# EAGLE board LibreServo-v2.2 (EAGLE 7.6.0)
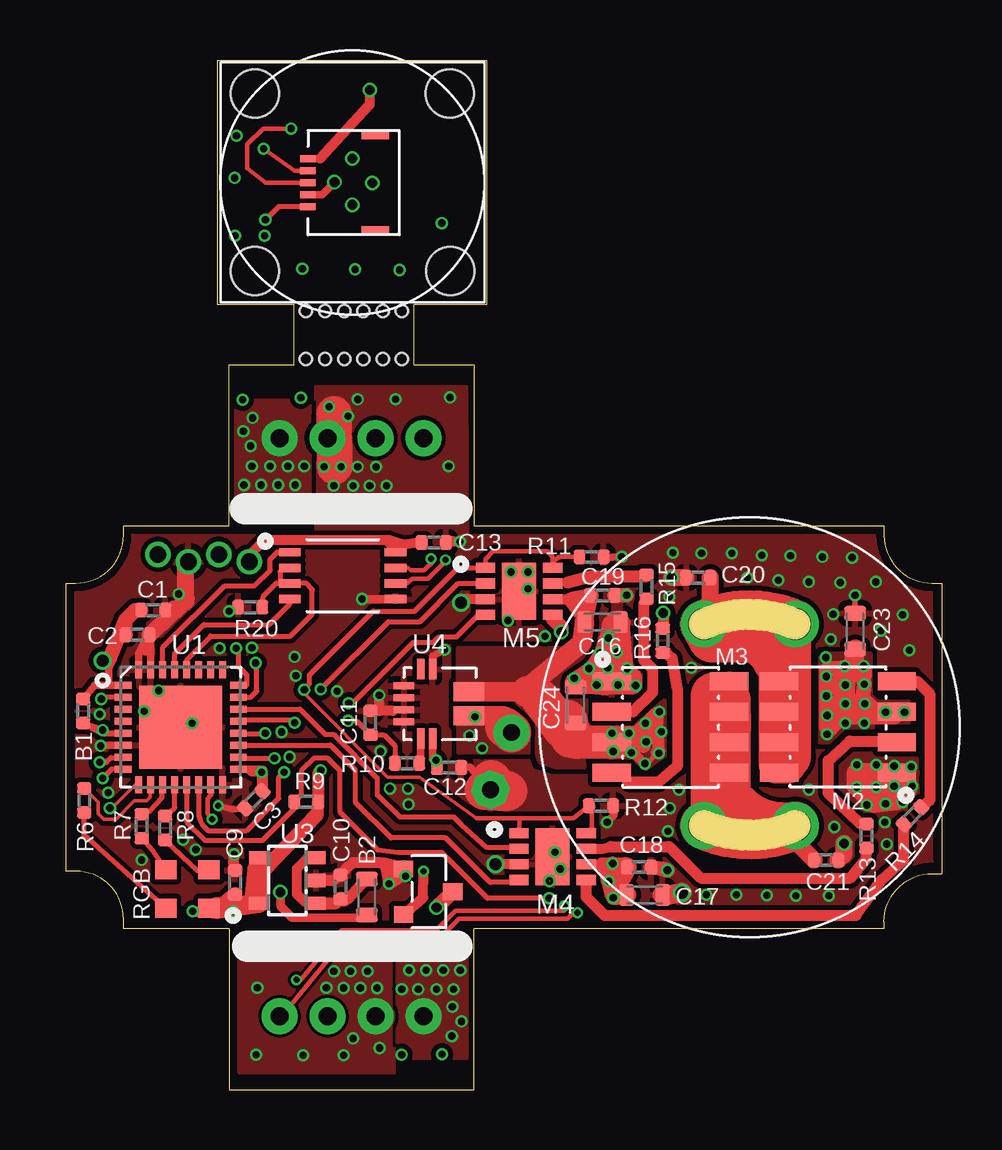
[diagram p0: board, top side]
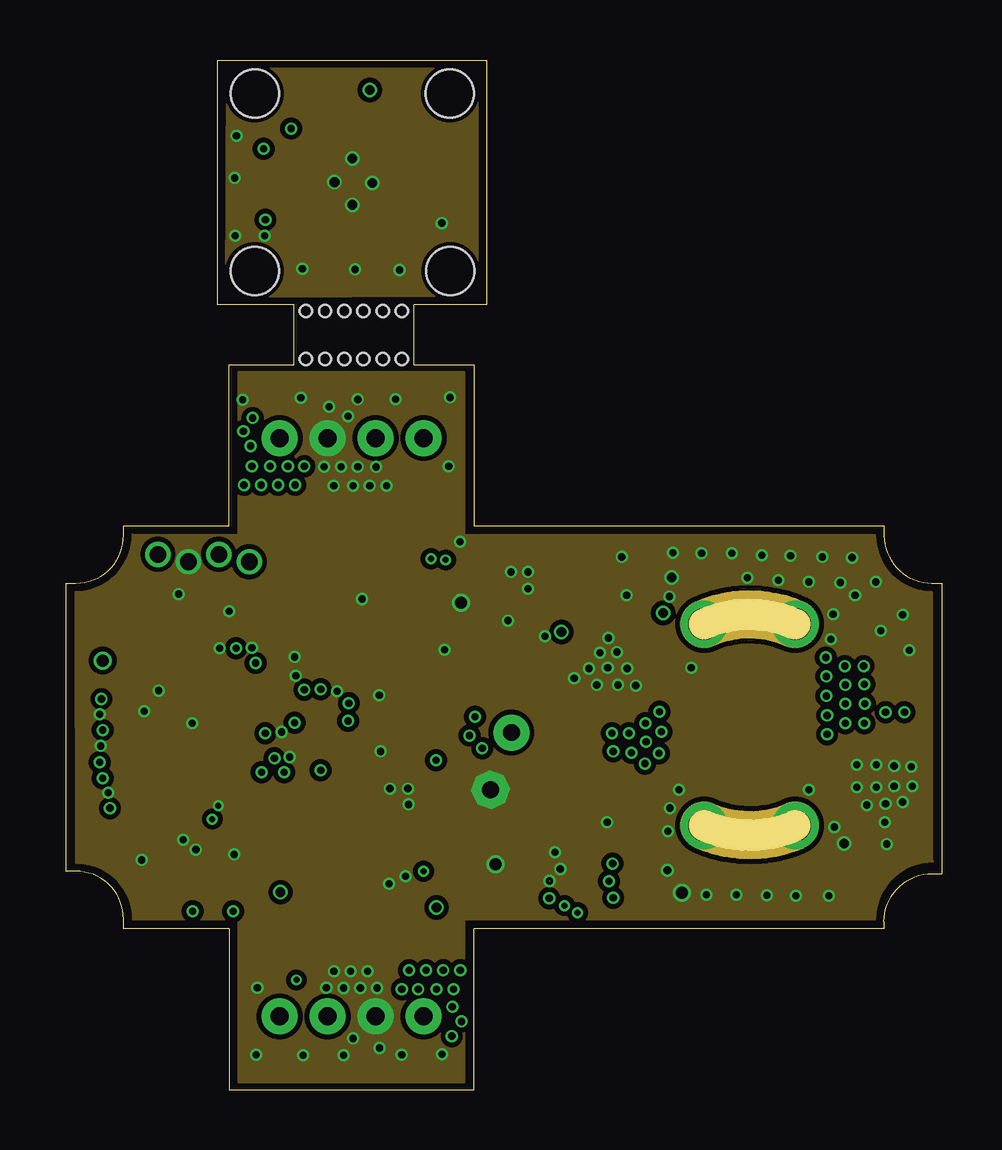
[diagram p1: board, inner layer Route2]
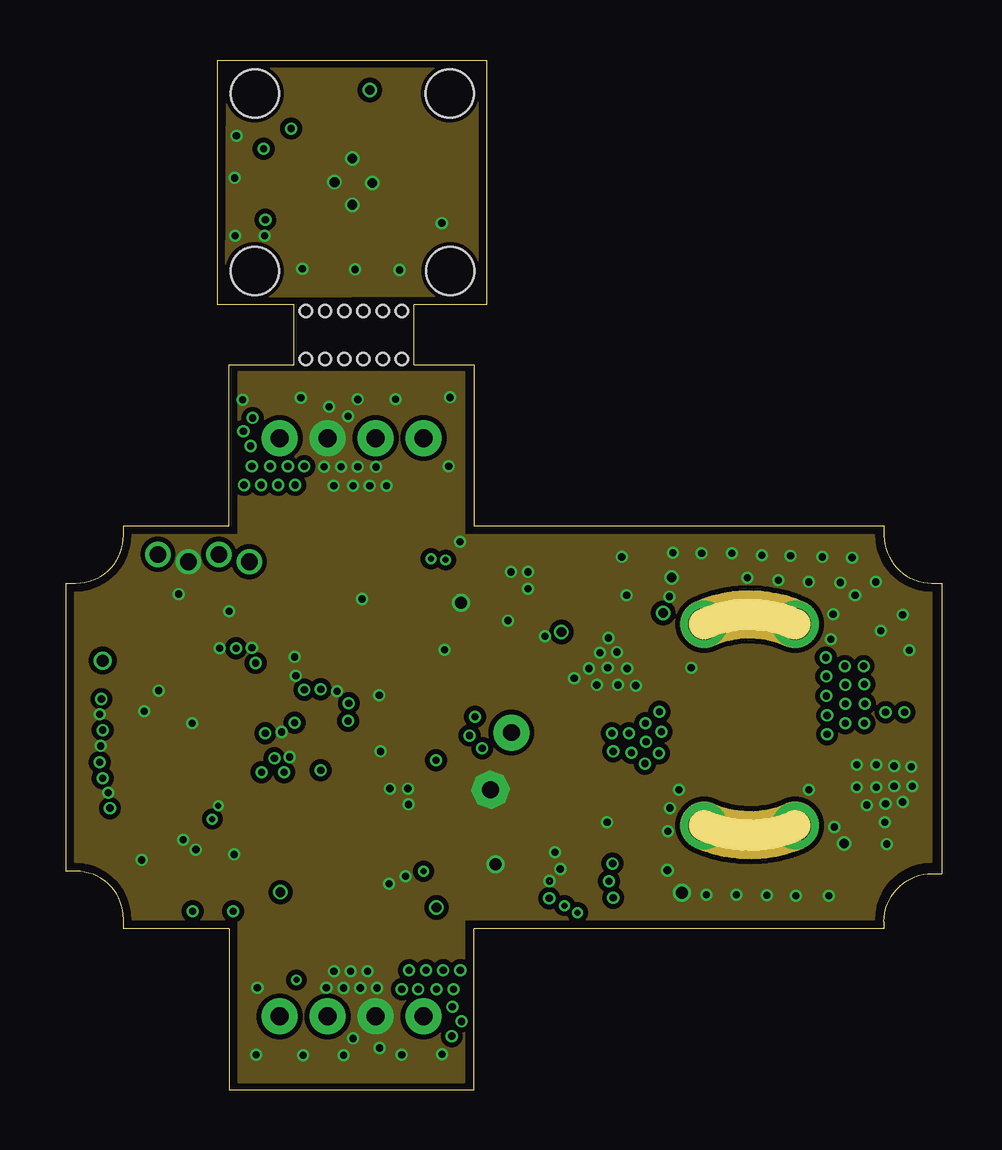
[diagram p2: board, inner layer Route3]
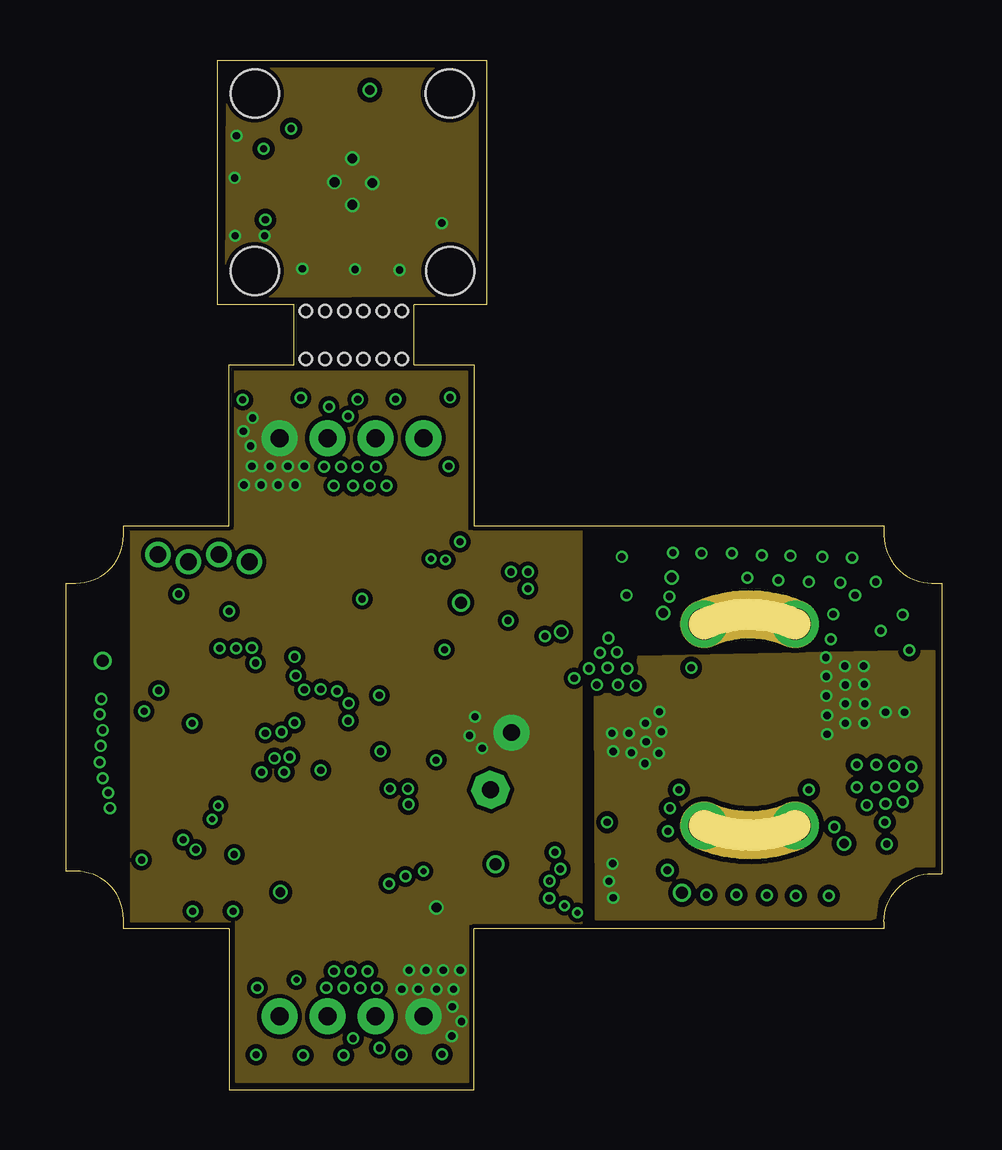
[diagram p3: board, inner layer Route14]
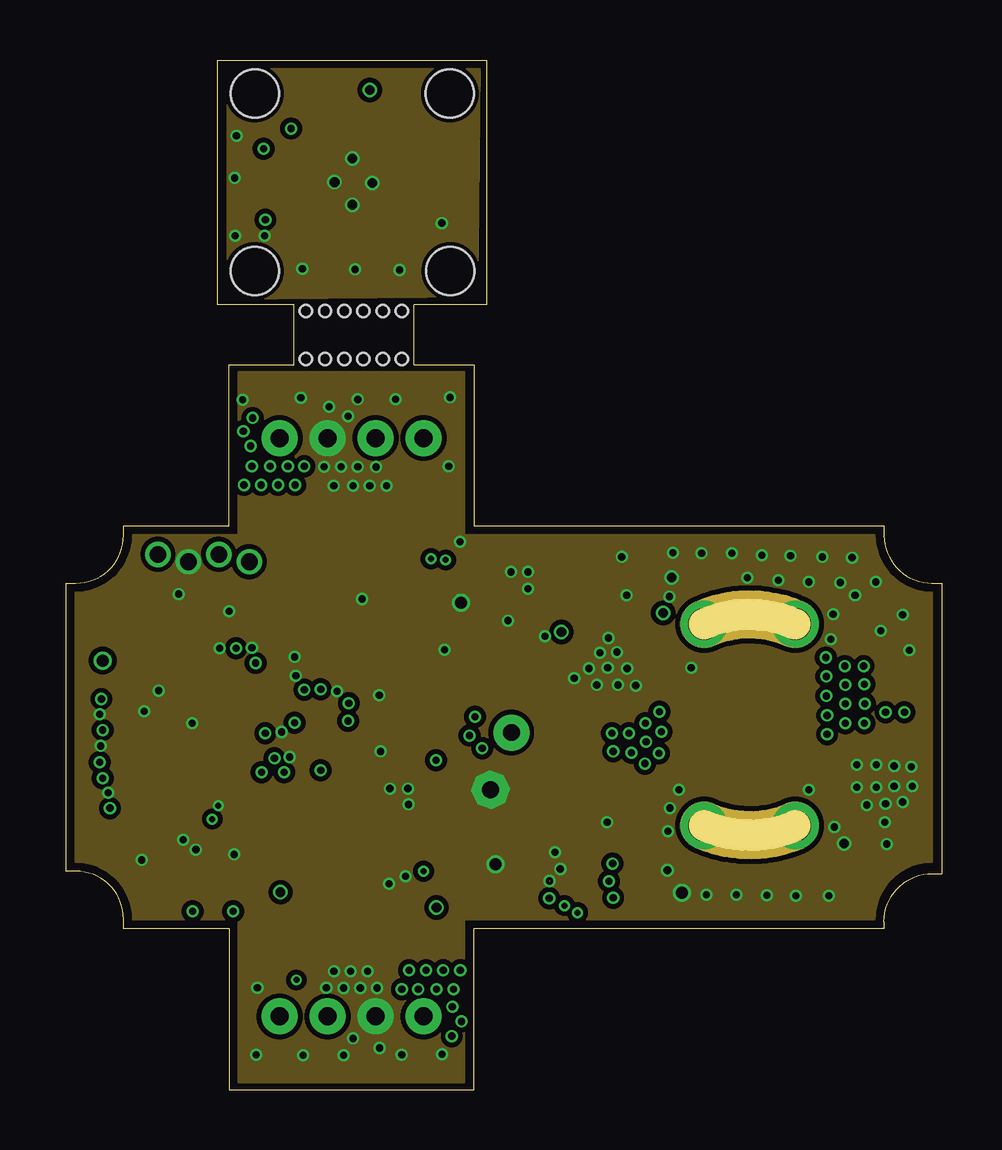
[diagram p4: board, inner layer Route15]
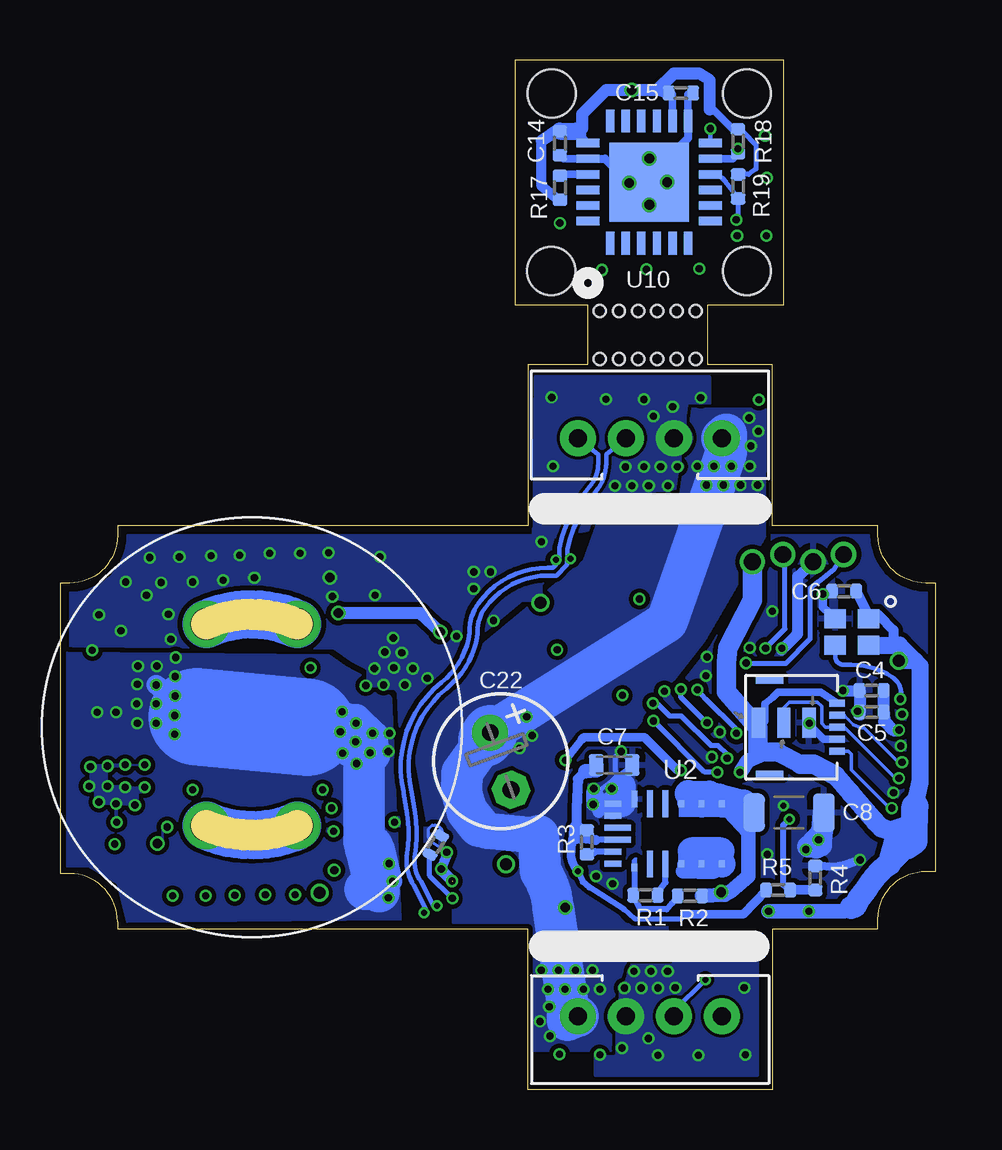
[diagram p5: board, bottom side, seen from below]

Size 36.5 x 42.9 mm. Coordinates in mm from the lower left corner, seen from the top.
Outline: 2.4,7.1 arc90 0.4,9.1 0,9.1 0,21.1 0.4,21.1 arc90 2.4,23.1 2.4,23.5 6.8,23.5 6.8,30.2 9.5,30.2 9.5,32.7 6.33,32.7 6.33,42.9 17.53,42.9 17.53,32.7 14.5,32.7 14.5,30.2 17,30.2 17,23.5 34.1,23.5 34.1,23.1 arc90 36.1,21.1 36.5,21.1 36.5,9 36.1,9 arc90 34.1,7 34.1,6.7 17,6.7 17,0 6.8,0 6.8,6.7 2.4,6.7 2.4,7.1
Copper layers (1+2*3+14*15+16): Top 0.035mm / dielectric 0.0994mm / Route2 0.0152mm / dielectric 0.3196mm / Route3 0.0152mm / dielectric 0.1088mm / Route14 0.0152mm / dielectric 0.3196mm / Route15 0.0152mm / dielectric 0.0994mm / Bottom 0.035mm
Design rules "jlcpcb_6_layer": minimum track width 5mil, minimum drill 0.25mm, track to track 0.126490625mm, track to pad 0.126490625mm, pad to pad 0.126490625mm, via to via 0.126490625mm, smd to smd 0mil, copper to edge 0.2mm, drill to drill 5mil, minimum pad ring 4mil, minimum via ring 4mil, stop-mask expansion 3mil, vias tented up to drill 100mil, thermal gap 10mil
Net classes: 1 Diff: width 0.178 mm, clearance 0.152 mm
Holes 2 mm at 7.87,34.11 7.87,41.5 15.99,41.5 16.02,34.11
Holes 0.5 mm at 10,30.45 10.8,30.45 11.6,30.45 12.4,30.45 13.2,30.45 14,30.45 10,32.45 10.8,32.45 11.6,32.45 12.4,32.45 13.2,32.45 14,32.45

## Footprints (pad centres in the part's own frame; a part is rotated, then mirrored left to right if it is on the bottom)
0402 = smd 0.5 x 0.6: 1 -0.5,0; 2 0.5,0
0603 = smd 0.6 x 0.9: 1 -0.75,0; 2 0.75,0
1206 = smd 0.9 x 1.6: 1 -1.45,0; 2 1.45,0
E2,5-6_MIN = drill 0.7 pad 1.5: + -1.27,0 | drill 0.7 pad 1.5 octagon: - 1.27,0
SOT23 = smd 0.7 x 0.8: P$1 -0.95,-1.25; P$2 0,0.8; P$3 0.95,-1.25
SO-8 = smd 1.6 x 0.75: P$1 -2.45,1.905; P$2 -2.45,0.635; P$3 -2.45,-0.635; P$4 -2.45,-1.905; P$5 2.45,-1.905; P$6 2.45,-0.635; P$7 2.45,0.635; P$8 2.45,1.905
MLP8 = smd 0.8 x 0.42: P$1 -1.4,0.975; P$2 -1.4,0.325; P$3 -1.4,-0.325; P$4 -1.4,-0.975; P$5 1.4,-0.975; P$6 1.4,-0.325; P$7 1.4,0.325; P$8 1.4,0.975 | smd 1.42 x 2.37: P$9 0,0
0402_MIN = smd 0.4 x 0.6: 1 -0.45,0; 2 0.45,0
PLCC-4_2.2X2 = smd 0.9 x 0.8: P$1 -0.9,0.8; P$2 -0.9,-0.8; P$3 0.9,-0.8; P$4 0.9,0.8
QFN32 = smd 0.3 x 0.7: 1 -1.75,-2.4; 2 -1.25,-2.4; 3 -0.75,-2.4; 4 -0.25,-2.4; 5 0.25,-2.4; 6 0.75,-2.4; 7 1.25,-2.4; 8 1.75,-2.4; 17 1.75,2.4; 18 1.25,2.4; 19 0.75,2.4; 20 0.25,2.4; 21 -0.25,2.4; 22 -0.75,2.4; 23 -1.25,2.4; 24 -1.75,2.4 | smd 0.7 x 0.3: 9 2.4,-1.75; 10 2.4,-1.25; 11 2.4,-0.75; 12 2.4,-0.25; 13 2.4,0.25; 14 2.4,0.75; 15 2.4,1.25; 16 2.4,1.75; 25 -2.4,1.75; 26 -2.4,1.25; 27 -2.4,0.75; 28 -2.4,0.25; 29 -2.4,-0.25; 30 -2.4,-0.75; 31 -2.4,-1.25; 32 -2.4,-1.75 | smd 3.45 x 3.45: EP 0,0
MPM36XX = smd 0.3 x 0.25: P$1 -1.4,1.55; P$4 -1.25,-0.4; P$5 -1.25,-1.25; P$6 -1.25,-2.1; P$7 1.25,-2.1; P$8 1.25,-1.25; P$9 1.25,-0.4 | smd 1.1 x 0.25: P$2 -1.25,0.9; P$3 -1.25,0.25 | smd 1.125 x 0.25: P$10 1.25,0.25; P$11 1.25,0.9 | smd 0.7 x 0.25: P$12 1.45,1.55 | smd 0.25 x 0.7: P$13 1.25,2.45; P$14 0.75,2.45; P$17 -0.75,2.45; P$18 -1.25,2.45 | smd 0.25 x 1.1: P$15 0.25,2.25; P$16 -0.25,2.25
SOT25 = smd 0.55 x 0.8: 1 -0.95,-1.2; 2 0,-1.2; 3 0.95,-1.2; 4 0.95,1.2; 5 -0.95,1.2
ACS711-QFN = smd 1.27 x 0.8: P$1 0,0.5; P$3 0,-0.5 | smd 0.3 x 0.85: P$5 1.5,-1.45; P$6 2,-1.45; P$11 2,1.45; P$12 1.5,1.45 | smd 0.85 x 0.3: P$7 2.7,-0.75; P$8 2.7,-0.25; P$9 2.7,0.25; P$10 2.7,0.75
MSOP-8 = smd 0.9 x 0.35: P$1 -2.2,0.975; P$2 -2.2,0.325; P$3 -2.2,-0.325; P$4 -2.2,-0.975; P$5 2.2,-0.975; P$6 2.2,-0.325; P$7 2.2,0.325; P$8 2.2,0.975
QFN24 = smd 0.95 x 0.35: P$1 -2.55,1.625; P$2 -2.55,0.975; P$3 -2.55,0.325; P$4 -2.55,-0.325; P$5 -2.55,-0.975; P$6 -2.55,-1.625; P$13 2.55,-1.625; P$14 2.55,-0.975; P$15 2.55,-0.325; P$16 2.55,0.325; P$17 2.55,0.975; P$18 2.55,1.625 | smd 0.35 x 0.95: P$7 -1.625,-2.55; P$8 -0.975,-2.55; P$9 -0.325,-2.55; P$10 0.325,-2.55; P$11 0.975,-2.55; P$12 1.625,-2.55; P$19 1.625,2.55; P$20 0.975,2.55; P$21 0.325,2.55; P$22 -0.325,2.55; P$23 -0.975,2.55; P$24 -1.625,2.55 | smd 3.3 x 3.3: P$25 0,0
SERVO_SLOT = drill 1.3: P$1 -1.9,4.2; P$2 1.9,4.2
FFC-5-0.5 = smd 0.3 x 0.65: P$1 -1,0; P$2 -0.5,0; P$3 0,0; P$4 0.5,0; P$5 1,0 | smd 0.3 x 1.15: P$6 -1.96,2.81; P$7 1.96,2.81
HEADER_4_1.27_0.3 = drill 0.7 pad 1.016: P$1 -2.54,0; P$2 -1.27,0.3; P$3 0,0; P$4 1.27,0.3
POTEN_SERVO = smd 0.55 x 1.27: P$1 -1.05,0; P$2 0,0; P$3 1.05,0
JST_PH-4_HOLE_B = drill 0.75 pad 1.5: P$1 -3,0; P$2 -1,0; P$3 1,0; P$4 3,0
OSC-2X1.6 = smd 0.8 x 0.9: P$1 -0.55,0.7; P$2 -0.55,-0.7; P$3 0.55,-0.7; P$4 0.55,0.7

## Placement (x,y rotation side)
B1  [0402]  0.71,15.77 90 top
B2  [0603]  12.54,8.03 270 top
C1  4.7u  [0402]  3.64,19.98 180 top
C2  100n  [0402]  2.98,18.95 180 top
C3  100n  [0402]  7.82,12.08 225 top
C4  1u  [0402]  2.67,16.63 180 bottom
C5  100n  [0402]  2.67,15.73 180 bottom
C6  100n  [0402]  3.81,20.77 180 bottom
C7  10u  [0603]  13.39,13.52 0 bottom
C8  22u  [1206]  6.12,11.54 180 bottom
C9  1u  [0402]  7.05,8.63 90 top
C10  1u  [0402]  11.44,8.44 90 top
C11  100n  [0402]  12.69,15.28 90 top
C12  1u  [0402]  15.96,13.42 180 top
C13  1u  [0402]  15.33,22.8 180 top
C14  100n  [0402]  15.66,39.44 270 bottom
C15  1u  [0402]  10.61,41.52 0 bottom
C16  10u  [0603]  22.37,19.48 180 top
C17  10u  [0603]  24.12,8.11 180 top
C18  100n  [0402]  23.89,9.27 180 top
C19  100n  [0402]  22.36,20.59 180 top
C20  10n  [0402]  26.35,21.33 180 top
C21  10n  [0402]  31.69,9.56 0 top
C22  220uF  [E2,5-6_MIN]  18.13,13.68 290 bottom
C23  10u  [0603]  32.89,19.1 90 top
C24  10u  [0603]  21.23,16.02 90 top
M1  M1  [SOT23]  15.32,8.24 270 top
M2  FDS8858CZ  [SO-8]  32.18,15.1 180 top
M3  FDS8858CZ  [SO-8]  25.2,15.1 0 top
M4  FAN3227/3  [MLP8]  20.29,9.71 0 top
M5  FAN3227/3  [MLP8]  18.89,20.76 0 top
NTC  [0402_MIN]  20.84,10.19 238 bottom
R1  12.5K  [0402]  12.09,8.1 180 bottom
R2  47K  [0402]  10.24,8.07 0 bottom
R3  150K  [0402]  14.54,10.3 90 bottom
R4  10K  [0402]  5.02,8.82 270 bottom
R5  51K  [0402]  6.56,8.31 180 bottom
R6  187  [0402]  0.76,12.05 270 top
R7  270  [0402]  3.16,10.98 270 top
R8  309  [0402]  4.13,10.9 270 top
R9  10K  [0402]  10.01,11.99 0 top
R10  1.1k  [0402]  14.21,13.6 0 top
R11  10K  [0402]  21.91,22.2 0 top
R12  10K  [0402]  22.29,11.83 0 top
R13  6  [0402]  33.36,10.57 270 top
R14  6  [0402]  35.28,11.41 225 top
R15  6  [0402]  24.2,20.95 90 top
R16  6  [0402]  24.87,18.71 90 top
R17  10K  [0402]  15.65,37.58 270 bottom
R18  10K  [0402]  8.23,39.51 270 bottom
R19  10K  [0402]  8.23,37.63 270 bottom
R20  10K  [0402]  7.68,20.1 180 top
RGB  LED_RGB_PLCC4_2.2X2  [PLCC-4_2.2X2]  5.06,8.35 180 top
U1  STM32F301/2  [QFN32]  4.78,15.1 270 top
U2  MPM3610  [MPM36XX]  11,10.66 90 bottom
U3  AP2112  [SOT25]  9.22,8.71 90 top
U4  ACS711  [ACS711-QFN]  16.79,16.07 180 top
U5  SIT3485  [MSOP-8]  11.54,21.42 0 top
U10  AEAT-8800  [QFN24]  11.94,37.81 90 bottom
U$1  SLOT  [SERVO_SLOT]  28.5,15.2 0 top
U$2  SLOT  [SERVO_SLOT]  28.5,15.2 180 top
U$3  FFC-5  [FFC-5-0.5]  10.09,37.79 270 top
U$4  FFC-5  [FFC-5-0.5]  4.1,15.1 90 bottom
U$5  HEADER_4_1.27_0.3  [HEADER_4_1.27_0.3]  5.1,22 0 bottom
U$6  POTEN_SERVO  [POTEN_SERVO]  6.32,15.29 0 bottom
U$8  JST_PH-4_HOLEB  [JST_PH-4_HOLE_B]  11.9,3.05 180 top
U$9  JST_PH-4_HOLEB  [JST_PH-4_HOLE_B]  11.9,27.15 0 top
U$100  OSCILATOR  [OSC-2X1.6]  3.49,19.07 270 bottom

## Library data of the parts
B1 B2 C1-C21 C23 C24 M1-M5 NTC R1-R20 RGB U1-U5 U10 U$1-U$6 U$8 U$9 U$100 = Propio
C22 = rcl

## Nets
711_OUT: R10.2 U4.P$11
+3V3: B1.2 C1.2 C2.2 C3.1 C6.1 C9.1 C12.2 C13.2 R9.2 RGB.P$1 U1.1 U1.17 U3.5 U4.P$12 U5.P$8 U$4.P$5 U$5.P$1 U$6.P$1 U$100.P$1 U$100.P$4
+3V3_2: C14.1 C15.1 R17.2 R18.1 R19.1 U10.P$14 U10.P$19 U$3.P$1
+5V: C16.2 C17.2 C18.2 C19.2 C23.1 C24.1 M2.P$3 M3.P$3 M4.P$6 M5.P$6 U4.P$3
+7V: C22.+ M1.P$2 U4.P$1 U$8.P$1 U$9.P$1
CLK-8MHZ: U1.2 U$100.P$3
EN-Q: M4.P$1 M4.P$8 M5.P$1 M5.P$8 R11.1 R12.1 U1.20
GND: C1.1 C2.1 C3.2 C4.2 C5.2 C6.2 C7.2 C8.1 C9.2 C10.2 C11.2 C12.1 C13.1 C16.1 C17.1 C18.1 C19.1 C20.2 C21.2 C22.- C23.2 C24.2 M1.P$1 M2.P$1 M3.P$1 M4.P$3 M4.P$9 M5.P$3 M5.P$9 NTC.1 R4.1 R11.2 R12.2 R20.2 U1.6 U1.16 U1.31 U1.32 U1.EP U2.P$12 U2.P$13 U2.P$14 U3.2 U4.P$5 U4.P$7 U4.P$8 U4.P$9 U4.P$10 U5.P$5 U$4.P$2 U$5.P$3 U$6.P$3 U$8.P$2 U$9.P$2 U$100.P$2
GND_2: C14.2 C15.2 U10.P$13 U10.P$20 U10.P$25 U$3.P$4
IN_AP2112: B2.1 C10.1 U3.1 U3.3
JTCK: U1.24 U$5.P$2
JTMS: U1.23 U$5.P$4
LED_BLUE: R8.1 U1.12
LED_GREEN: R7.1 U1.11
LED_RED: R6.1 U1.10
M1-OUT: C7.1 M1.P$3 R3.2 R5.2 U2.P$16
M2-OUT: C20.1 M2.P$5 M2.P$6 M2.P$7 M2.P$8 U$1.P$1
M3-OUT: C21.1 M3.P$5 M3.P$6 M3.P$7 M3.P$8 U$2.P$1
M4-OUTA: M4.P$7 R13.2
M4-OUTA-IN: M2.P$2 R13.1
M4-OUTB: M4.P$5 R14.2
M4-OUTB-IN: M2.P$4 R14.1
M5-OUTA: M5.P$7 R15.2
M5-OUTA-IN: M3.P$2 R15.1
M5-OUTB: M5.P$5 R16.2
M5-OUTB-IN: M3.P$4 R16.1
MPM3610_AGND: R1.1 U2.P$3
MPM3610_EN: R3.1 U2.P$17
MPM3610_FB: R1.2 R2.1 U2.P$1
MPM3610_SW: U2.P$4 U2.P$5 U2.P$6
N$1: R6.2 RGB.P$4
N$4: R7.2 RGB.P$3
N$5: R8.2 RGB.P$2
N$17: R17.1 U10.P$21
OUT_MPM3610: B2.2 C8.2 R2.2 U2.P$7 U2.P$8 U2.P$9
PWM-1: M5.P$4 U1.18
PWM-2: M5.P$2 U1.21
PWM-3: M4.P$4 U1.19
PWM-4: M4.P$2 U1.22
RS485_N [Diff]: U5.P$7 U$8.P$3 U$9.P$3
RS485_P [Diff]: U5.P$6 U$8.P$4 U$9.P$4
SEL_SERIAL: R20.1 U1.28 U5.P$2 U5.P$3
SPI_CLK: U1.9 U$4.P$1
SPI_CLK_2: R19.2 U10.P$10 U$3.P$5
SPI_IN: U1.7 U$4.P$4
SPI_IN_2: R18.2 U10.P$11 U$3.P$2
SPI_OUT: U1.8 U$4.P$3 U$6.P$2
SPI_OUT_2: U10.P$12 U$3.P$3
USART1_RX: U1.30 U5.P$1
USART1_TX: U1.29 U5.P$4
V_BAT: R4.2 R5.1 U1.15
V_CORRIENTE: C11.1 R10.1 U1.14
V_TEMP: NTC.2 R9.1 U1.13
VDDA-FILTRADO: B1.1 C4.1 C5.1 U1.5

## Tracks (layer width: path | path; a pad name or v marks a point on that pad's centre or on a via)
711_OUT
  Top 0.305: U4.P$11 14.79,13.78 R10.2
+3V3  (via drill 0.3, 0.5)
  Top 0.203: 15.29,14.88 15.29,13.85 v15.43,13.73
  Top 0.254: 7.68,13.35 8.03,13.35 v8.15,13.23
  Top 0.305: B1.2 1.19,16.85 1.78,16.85 | 1.78,16.85 U1.1 | C12.2 15.29,13.78 | 15.29,13.78 U4.P$12 | U1.17 7.68,13.35 7.75,13.28 | 15.29,13.78 15.37,13.72 v15.43,13.73 | 1.78,16.85 1.78,17.55 1.96,17.9 v1.52,17.88
  Top 0.356: 13.89,22.68 U5.P$8 13.39,22.89
  Top 0.406: 2.41,19.45 C2.2 | 1.7,17.82 1.83,17.98 | C13.2 13.89,22.68 | U$5.P$1 7.64,22.27 8.28,22.9 13.46,22.9 14.1,22.7 13.39,22.89
  Top 0.457: 7.75,13.28 8.18,13.28 C3.1 | RGB.P$1 5.95,7.58 arc-90 v6.96,7.44 6.12,7.36 v5.28,7.44 | U3.5 7.9,7.86
  Top 0.508: R9.2 10.49,11.56 | v10.62,13.3 10.52,13.2 R9.2 | 10.41,11.42 10.49,11.47 R9.2
  Top 0.61: 1.83,17.98 2.41,19.45 | v1.52,17.88 1.7,17.82 | 6.27,7.51 C9.1 | C1.2 2.89,19.98 2.46,19.55 2.46,18.96 C2.2 | 8.03,9.16 8.26,9.16 10.41,11.42
  Top 0.66: 6.27,7.61 v6.96,7.44
  Top 0.813: U3.5 6.27,7.51 6.27,7.61
  Top 0.914: 7.9,7.86 8.03,9.16
  Bottom 0.203: 1.64,10.45 1.86,10.67 2.02,10.84
  Bottom 0.305: 8.18,13.25 v8.15,13.23 | v15.43,13.73 14.76,14.57 | U$6.P$1 7.11,15.35 7.11,16.07 6.78,16.35 6.58,16.55 4.78,16.55 U$4.P$5
  Bottom 0.356: 14.76,14.57 14.66,14.68 12.14,14.68 10.77,13.3 v10.62,13.3
  Bottom 0.406: C6.1 2.83,19.78 | 2.83,19.78 U$100.P$1 | 2.83,19.78 2.38,19.78 1.75,19.15 1.75,18.52
  Bottom 0.457: v8.15,13.23 8.1,13.28
  Bottom 0.559: 7.41,15.07 U$6.P$1 | 7.16,13.99 7.41,14.08
  Bottom 0.61: v6.96,7.44 3.81,7.44 3.53,7.59 | 8.1,13.28 7.82,13.71 7.16,13.99 | 1.27,11.09 2.02,10.84 1.91,10.79
  Bottom 0.711: 0.86,11.8 0.64,12.82 0.64,17.65 0.86,17.88 | 0.86,17.88 v1.52,17.88 | U$100.P$4 1.75,18.52 1.5,18.52 0.86,17.88
  Bottom 0.762: 5.64,13.56 6.58,14.07
  Bottom 0.813: 5.64,13.56 5.08,13.56 4.17,13.07 3.53,12.34 2.52,11.17 2.26,10.92 1.91,10.79 | 6.58,14.07 7.41,14.08 7.41,15.07 8.71,16.58 8.71,17.8 8.66,18.41 7.64,20.39 U$5.P$1
  Bottom 0.9: 1.92,9.4 1.21,10.14
  Bottom 0.965: 1.64,10.45 1.92,9.4 arc-27 2.82,8.45 arc15 3.15,8.02 3.35,7.64 3.53,7.59
  Bottom 1.118: 1.21,10.14 0.89,10.36 0.86,11.8
+3V3_2  (via drill 0.4)
  Top 0.305: U$3.P$1 10.57,38.79
  Top 0.406: 10.57,38.79 12.65,41.05 12.67,41.05 v12.67,41.65
  Bottom 0.203: R19.1 7.8,38.13 7.48,38.37 7.48,39.36 8.04,39.91 8.11,39.89 R18.1 8.26,40.04 8.47,40.04
  Bottom 0.305: U10.P$14 10.96,41.48 C15.1 | 14.99,39.94 U10.P$19 14.72,39.67 14.72,40.04 | R17.2 15.75,37.08 | 15.69,40.04 C14.1 | 8.47,40.04 9.26,40.83 9.41,40.83
  Bottom 0.406: 15.75,37.08 16.43,37.63 16.43,39.54
  Bottom 0.508: 16.43,39.54 15.69,40.04 | 14.72,40.04 14.72,40.65 13.72,41.65 v12.67,41.65 11.59,41.65 | 11.59,41.65 C15.1 | 9.41,40.83 9.41,42.05 9.85,42.33 10.91,42.33 11.59,41.65
  Bottom 0.711: C14.1 14.99,39.94
+5V  (via drill 0.3)
  Top 0.203: 24.61,14.04 24.23,13.56 23.75,14.09 | 23.22,14.09 v23.57,14.04 23.75,14.09 | 23.75,14.09 23.85,14.09 24.08,14.32
  Top 0.356: v24.13,13.58 v23.57,14.04
  Top 0.406: M4.P$6 22.33,9.37 | M5.P$6 21.03,20.44
  Top 0.457: 31.8,15.11 31.77,15.11 v31.73,14.8 | v31.73,15.59 31.83,15.61 32.31,15.61 32.46,15.61 v32.49,16.07 | 33.5,15.89 33.45,15.89 v33.27,15.26 | 32.51,16.91 32.56,17.6 v32.46,17.65 | v31.7,17.22 31.8,17.24 | 31.8,17.09 31.8,16.66 v31.7,16.4 | v33.25,17.65 33.22,17.16 33.2,17.29
  Top 0.483: 21.03,20.44 21.03,20.42 | 23.32,9.39 22.55,9.29
  Top 0.508: 24.61,15.51 v24.71,14.02 24.61,14.04 | 22.78,14.09 23.04,14.07 23.01,14.09 | v22.81,14.09 23.01,14.09 | 23.22,14.09 23.01,14.09 | 24.56,14.7 v24.82,14.9 | v24.74,15.74 24.59,15.49
  Top 0.559: 20.68,15.06 20.76,15.09 | 20.76,15.09 C24.1 | 20.85,15.39 20.76,15.09
  Top 0.61: 22.55,9.29 22.61,9.19 | 21.03,20.42 21.39,19.93 C19.2 | 22.33,9.37 23.32,9.39 22.63,9.11 v22.78,9.42 | M3.P$3 22.71,14.85 v22.76,14.85 v23.47,14.85 23.82,14.85 | 23.82,14.85 24.61,15.64 24.61,15.51 24.59,15.49 | 24.08,14.32 24.08,14.57 24.21,14.7 | 24.21,14.7 23.82,14.7 23.65,14.52 | 23.01,14.09 22.78,14.09 | 23.82,14.85 23.88,14.85 | 24.21,14.7 24.56,14.7 | 33.2,17.29 v33.27,16.89 33.2,16.2 | v22.81,8 23.02,8.07 C17.2 | v22.63,8.68 22.59,8.71 22.77,8.89 | 21.41,14.78 20.85,15.39
  Top 0.66: 21.26,20.42 C19.2
  Top 0.711: C16.2 21.82,20.52 21.13,20.39 21.26,20.42
  Top 0.813: 22.77,8.89 22.61,9.19 23.13,8.81 C18.2 | 22.94,8.2 C17.2 | C16.2 21.51,18.61 19.09,16.64 19.24,16.57 U4.P$3 | M2.P$3 34.51,15.61 32.31,15.61 31.8,15.11 31.8,17.09 31.8,17.24 31.8,17.44 32.79,17.5 | 32.79,17.5 33.2,17.34 33.2,17.29 | 33.2,16.2 33.5,15.89 32.66,15.89 32.46,16.1 v32.49,16.86 32.46,16.86 32.51,16.91 | 32.79,17.5 C23.1
  Top 1.016: 22.77,8.89 22.94,8.2 | 21.29,14.46 21.06,14.68
  Top 1.321: 19.24,16.57 19.79,16.28
  Top 1.372: M3.P$3 21.29,14.46
  Top 1.626: 19.79,16.28 20.22,15.72
  Top 1.651: 20.22,15.72 20.68,15.06
  Top 1.727: 21.06,14.68 20.85,15.39
  Bottom 0.305: 23.16,9.67 23.16,9.65 v22.78,9.42
  Bottom 0.813: 30.78,15.54 v32.49,16.86 | 23.19,8.24 23.05,8.24 v22.63,8.68
  Bottom 1.016: v24.82,14.9 23.34,14.78 23.32,14.8 23.32,13.99 24.54,13.99 24.59,14.04 v24.82,14.9 | v24.82,14.9 24.59,15.51 24.64,15.57 24.11,15.57 23.34,14.8 24.51,14.8 24.4,14.73
  Bottom 1.727: 23.6,10.05 23.82,10.31 23.82,13.96 v23.57,14.04 | 23.29,8.83 23.77,8.35 23.3,8.35 23.19,8.24
  Bottom 2.032: 23.6,10.05 23.29,8.83
  Bottom 2.54: 26.2,15.1 v24.82,14.9
  Bottom 4.064: 30.78,15.54 26.2,15.1
  other vias: 33.3,16.07 32.49,15.26 34.16,15.72 34.95,15.72 31.67,18 24.16,15.26 24.18,14.5
  pour Top (isolate 0.178, rank 2, no thermals): 16.33,16.28 16.33,18.38 21.82,18.38 21.77,15.08 23.65,15.08 24.94,16.23 24.94,13.91 24.18,13.35 23.57,13.84 21.56,13.86 21.59,13.41 20.42,13.43 19.76,13.63 18.75,16.28
  pour Bottom (isolate 0.178, no thermals): 24.6,17.6 25.3,18.1 36.2,18.2 36.2,9.3 35.3,9.3 34.1,8.6 33.7,7 22.3,7.1 22.7,16.3 23.1,16.8
  pour Route14 (isolate 0.203, no thermals): 22.1,7.11 33.54,7.11 33.74,7.16 33.85,7.96 34.4,8.8 35.4,9.3 36.2,9.3 36.2,18.26 34.85,18.26 23.85,18.03 23.7,16.48 22.05,16.48
  pour Top (isolate 0.178, no thermals): 31.42,14.45 31.42,18 31.6,18.18 33.55,18.18 33.55,16.96 33.55,16.45 33.83,16.17 35.13,16.17 35.13,15.29 33.66,15.29 33.66,15.08 32.46,15.08 32.21,14.83 31.83,14.45
+7V  (via drill 0.3, 0.4)
  Top 0.61: M1.P$2 | M1.P$2 v15.44,7.59
  Top 0.762: 18.29,15.11 17.92,15.57
  Top 0.813: 18.24,15.57 17.92,15.57 U4.P$1
  Top 1.651: C22.+ 18.29,15.11
  Bottom 0.203: 16.46,9.09 16.59,8.5 16.2,8.33
  Bottom 0.61: v15.44,7.59 16.2,8.33
  Bottom 1.016: 18.69,10.79 19.02,10.97
  Bottom 1.524: 16.56,10.59 18.69,10.79
  Bottom 1.727: U$9.P$1 8.71,27.3 8.71,26.55 11.2,19.5 C22.+ | U$8.P$1 15.34,2.9 15.34,3.64 15.95,7.64 arc-28 16.46,9.09 16.56,10.59 | 19.02,10.97 19.53,11.6 19.76,12.39 19.74,13.2 18.75,14.6
  Bottom 2.286: 18.75,14.6 C22.+
  other vias: 15.01,4.97 15.72,4.97 16.43,4.97 7.42,25.19 8.84,25.19 9.55,25.19 8.13,25.19 7.77,27.99 7.7,26.82 14.3,4.97 16.1,3.45 16.08,2.23 7.39,27.43 16.48,2.84 16.15,4.19 15.44,4.19 14,4.19 14.68,4.19 7.75,25.98 8.51,25.98 9.25,25.98 9.93,25.98 17.04,15.54 16.81,14.75 17.35,14.22
  pour Bottom (isolate 0.178, no thermals): 7.09,28.39 10.14,28.36 10.64,24.83 13.77,24.45 14.67,22.03 22.05,15.91 21.21,11.19 20.4,9.47 20.52,8.53 20.09,8.1 20.12,7.08 20.12,6.95 16.99,6.95 16.84,6.86 16.81,1.62 16.56,1.62 13.94,1.62 13.54,1.63 13.54,3.55 12.88,5.41 11.18,5.43 11.18,6.88 12.9,6.9 15.37,9.47 15.01,12.8 15.39,13.96 14.88,14.88 12.65,14.85 9.65,18.69 7.11,23.03
  pour Route14 (isolate 0.178, no thermals): 7.04,29.92 7.04,23.29 2.72,23.29 2.72,7 7.09,7 7.09,0.32 16.76,0.32 16.76,6.9 21.49,6.9 21.49,23.26 16.71,23.26 16.71,29.92
  pour Top (no thermals): 16.33,15.87 16.33,14.04 19.3,14.04 19.3,15.06 18.49,15.87
  pour Top (isolate 0.203, no thermals): 13.8,1.32 16.74,1.32 16.74,5.68 13.8,5.68
  pour Top (isolate 0.203, no thermals): 7.06,28.75 10.17,28.75 10.17,24.3 7.06,24.3
CLK-8MHZ  (via drill 0.3)
  Top 0.203: U1.2 1.62,16.35 v1.47,16.28
  Bottom 0.178: U$100.P$3 4.19,18.03 arc-90 3.76,17.7 3.5,17.7 arc33 1.8,17.19 arc44 1.45,16.66 arc31 v1.47,16.28
EN-Q  (via drill 0.3)
  Top 0.152: 9.8,16.53 v9.93,16.66 9.93,16.5 13.41,13.03 14.73,13.03 17.12,11.3
  Top 0.178: M5.P$1 17.48,22.1 17.8,22.42 20.07,22.42 20.29,22.2 M5.P$8 arc-90 20.61,22.2 R11.1 | 18.89,10.62 18.9,11.29 | 18.9,11.29 18.9,11.3 21.16,11.3 R12.1 | 17.12,11.3 18.9,11.3 18.9,11.29 | 21.92,11.78 21.92,10.92 M4.P$8
  Top 0.203: U1.20 7.2,14.83 8.28,14.83 v8.31,14.85 | M5.P$1 16.33,21.74 14.53,19.93 12.8,19.93 10.13,17.27 10.13,16.91 v9.93,16.66
  Top 0.305: M4.P$1 18.89,10.62 | R12.1 21.92,11.78
  Bottom 0.203: v9.93,16.66 9.55,16.25 8.31,15.01 v8.31,14.85
GND  (via drill 0.25, 0.3, 0.35, 0.4, 0.5)  (1 unrouted)
  Top 0.127: M5.P$9 19.25,20.76 v19.25,20.87 | M4.P$9 20.48,9.78 v20.38,9.89
  Top 0.152: U1.EP 5.1,15.1 v5.26,15.26
  Top 0.203: C3.2 6.97,11.65 v6.35,11.83 7.44,11.63 | C23.2 v32.89,20.59
  Top 0.305: U1.31 3.53,18.66 | 3.53,18.66 3.3,18.39 | U1.32 3.03,18.17 3.17,18.49 3.45,18.33 3.53,18.66 | 12.94,15.78 C11.2 | U1.6 1.83,14.35 v1.45,14.32 | U4.P$5 15.29,18.05 v15.77,18.33 | R11.2 22.76,22.19 v23.16,22.19 | M1.P$1 13.46,8.48 v14.15,8.88 | C12.1 16.84,13.42 C22.- | R12.2 22.84,11.44 v22.55,11.14 | 17.45,12.49 C22.- | C22.- | 17.91,12.59 17.69,12.59 C22.-
  Top 0.356: C9.2 7,9.38 | v12.35,20.44 U5.P$5
  Top 0.406: C13.1 16.12,22.85 v16.42,22.83 | 12.94,15.78 13.07,15.78 v13.06,16.43 | M5.P$3 16.72,20.44 | 13.63,15.78 C11.2 | M4.P$3 17.99,9.39 v17.91,9.39 | v6.8,19.93 6.96,19.99 R20.2 | v12.34,20.44 v12.35,20.44 | 21.03,16.73 21.23,16.73 C24.2 | C1.1 4.45,20.16 5.16,20.47
  Top 0.457: U3.2 11.15,8.71 11.37,8.89 C10.2 11.74,9.28 11.96,9.47 13.06,9.47 13.27,9.44 | 16.72,20.44 v16.46,20.29 | 7,9.38 v7.01,9.8 | 13.46,8.66 13.89,9.27 13.27,9.44 | 13.27,9.44 v13.46,8.58 | M3.P$1 22.4,16.66 v22.12,16.86 22.53,16.66 21.03,16.73 21.03,17.04 21.92,17.09 21.06,17.09 21.84,17.62 23.42,17.52 23.77,17.24 23.77,16.78 23.65,16.68 22.55,16.68 21.87,17.37 21.84,17.6 22.17,18.08 23.42,17.55 23.29,19.07 23.27,18.03 22.17,18.03 22.5,18.99 22.61,18.26 22.45,18.41 22.58,19.45 22.63,19.5 22.81,19.71 23.11,19.2 v22.96,18.23
  Top 0.508: v34.87,11.98 34.59,12.03
  Top 0.61: 3.3,18.39 C2.1 | C18.1 24.84,9.2 v25.07,9.14 | C19.1 v23.37,20.59
  Top 0.66: C2.1 4.99,20.34
  Top 0.711: C20.2 25.67,21.33 v25.25,21.33 | C21.2 32.44,9.81 v32.44,10.26 | 4.99,20.34 4.99,21.89 U$5.P$3
  Top 0.813: C17.1 25.17,8.11 v25.68,8.2 | C16.1 23.11,18.61 v22.96,18.23 | M2.P$1 32.96,13.2 32.94,13.18 32.94,12.67 33.68,11.93 34.59,12.03 35.05,12.49 35.05,12.8 35,12.85 34.75,12.59 33.68,12.59
  Top 1.473: 11.2,25.95 11.18,28.16
  Top 1.676: 17.45,12.49 18.39,12.44 | 17.73,12.9 17.91,12.59
  Bottom 0.127: v20.38,9.89 21.06,10.34 21.13,10.52 21.13,10.87 20.98,11.02 20.88,11.02 arc116 NTC.1
  Bottom 0.203: 13.06,12.64 13.34,13.28 13.34,13.86 v13.11,14.09 12.65,13.63 | U2.P$13 U2.P$14 | C7.2 14.07,12.4 13.97,12.11
  Bottom 0.254: 13.06,11.93 U2.P$12
  Bottom 0.305: C5.2 3.15,15.6 | U$4.P$2 4.65,14.6 5.26,15.21 v5.26,15.26
  Bottom 0.356: U$100.P$2 4.7,20.11 v4.69,20.65 4.55,20.72 C6.2 | R4.1 4.17,9.29 3.73,9.37 v3.15,9.57
  Bottom 0.406: 20.57,9.27 20.47,9.52 20.32,9.88
  Bottom 0.457: v3.86,16.63 C4.2 | v20.14,8.68 20.57,9.11 20.57,9.27 | 6.43,18.31 5.74,18.99 5.74,21.38 5.21,21.86
  Bottom 0.508: 13.97,12.11 v14.25,12.54 | 14.28,12.39 14.05,11.58 | C4.2 C5.2 3.17,15.63 | 5.21,21.86 5.1,21.97 U$5.P$3
  Bottom 0.559: v14.28,11.88 14.28,12.39
  Bottom 0.914: v4.88,10.41 4.96,10.09 5.31,10.13 4.95,10.48 4.78,10.18 4.7,10.99 C8.1
  Bottom 1.118: U2.P$13 13.06,11.93 13.06,12.64
  other vias: 33.78,13.53 32.97,13.53 32.97,12.59 34.16,11.91 33.78,12.59 34.52,12.64 35.28,12.64 21.18,17.14 21.79,17.55 22.25,18.21 22.58,17.57 23.39,17.55 23.01,16.86 25.15,20.54 25.3,22.37 26.49,22.35 27.76,22.35 28.4,21.33 29.69,21.23 29.01,22.27 30.2,22.24 30.96,21.15 31.52,22.19 32.28,21.13 32.77,22.17 33.76,21.15 31.98,19.81 31.88,18.77 34.87,19.78 35.15,18.31 33.96,19.12 26.7,8.12 27.94,8.12 29.21,8.1 30.43,8.07 31.8,8.07 34.14,11.14 25.55,12.49 25.17,11.73 25.1,10.76 30.96,12.49 32.03,10.94 9.58,17.24 7.98,4.25 10.85,4.25 7.92,1.45 9.88,1.43 11.57,1.43 13.99,1.45 15.68,1.47 7.37,28.74 9.79,28.82 12.16,28.76 13.74,28.77 16,28.84 15.95,25.97 12.93,25.94 13.5,12.54 26.06,17.57 34.21,10.23 5.41,10 11.3,16.6 8.99,14.9 9.32,13.86 7.75,18.41 1.4,15.64 1.75,12.36 19.96,18.89 9.53,18.03 23.75,16.83 22.61,18.82 34.52,13.48 35.23,13.46 33.38,11.86 10.76,25.96 11.46,25.96 12.16,25.96 10.96,28.46 11.76,28.06 11.16,25.16 11.96,25.16 12.66,25.16 13.36,25.16 12.97,4.23 12.27,4.23 11.57,4.23 12.57,4.93 11.87,4.93 11.17,4.93 13.07,1.73 11.97,2.13 18.55,21.57 19.25,21.57 18.43,19.54 20.6,9.19 3.25,15.76 6.4,18.38
  pour Route2 (isolate 0.203, no thermals): 0.4,20.72 0.43,9.46 arc-90 2.81,7.1 33.72,7.1 arc-90 36.13,9.51 36.1,9.53 36.1,20.72 arc-90 33.72,23.1 2.78,23.13 arc-90
  pour Route15 (isolate 0.203, rank 2, no thermals): 0.4,20.7 0.4,9.5 arc-90 2.8,7.1 33.7,7.1 arc-90 36.1,9.5 36.1,20.7 arc-90 33.7,23.1 2.8,23.1 arc-90
  pour Route2 (isolate 0.203, no thermals): 7.2,23.1 7.2,29.9 16.6,29.9 16.6,23.1
  pour Route15 (isolate 0.203, no thermals): 7.2,23.1 7.2,29.9 16.6,29.9 16.6,23.1
  pour Route15 (isolate 0.203, rank 2, no thermals): 7.2,7.1 7.2,0.3 16.6,0.3 16.6,7.1
  pour Route2 (isolate 0.203, no thermals): 7.2,7.1 7.2,0.3 16.6,0.3 16.6,7.1
  pour Route3 (isolate 0.203, rank 2, no thermals): 0.37,20.7 0.37,9.5 arc-90 2.77,7.1 33.67,7.1 arc-90 36.07,9.5 36.07,20.7 arc-90 33.67,23.1 2.77,23.1 arc-90
  pour Route3 (isolate 0.203, no thermals): 7.2,23.1 7.2,29.9 16.6,29.9 16.6,23.1
  pour Route3 (isolate 0.203, rank 2, no thermals): 7.2,7.1 7.2,0.3 16.6,0.3 16.6,7.1
  pour Top (isolate 0.178, no thermals): 35.48,13.81 32.66,13.81 32.51,13.66 32.33,13.48 32.33,12.69 32.33,12.62 33.22,11.73 33.35,11.6 34.39,11.6 34.67,11.6 34.95,11.88 35.48,12.41
  pour Top (isolate 0.178, rank 2): 10.4,29.3 16.7,29.3 16.73,22.8 10.43,22.8
  pour Top (rank 2, no thermals): 13.7,0.7 13.7,5.6 12.7,5.6 7.2,5.6 7.2,1.5 7.2,0.7
  pour Bottom (rank 2, no thermals): 9.4,29.7 16.7,29.7 16.78,22.83 9.4,24.4
  pour Bottom (rank 2, no thermals): 7.4,5.9 14.2,5.9 14.2,0.6 7.4,0.6
  pour Top (isolate 0.203, rank 4): 0.4,20.72 0.43,9.46 arc-90 2.81,7.1 33.72,7.1 arc-90 36.13,9.51 36.1,9.53 36.1,20.72 arc-90 33.72,23.1 2.78,23.13 arc-90
  pour Bottom (isolate 0.203, rank 4): 0.37,20.7 0.37,9.5 arc-90 2.77,7.1 33.67,7.1 arc-90 36.07,9.5 36.07,20.7 arc-90 33.67,23.1 2.77,23.1 arc-90
GND_2  (via drill 0.3, 0.4)
  Top 0.305: U$3.P$4 10.67,37.29 v11.19,37.81
  Bottom 0.305: U10.P$13 10.31,41.47 C15.2 | U10.P$20 15.51,38.79 C14.2
  Bottom 0.33: U10.P$13 10.31,39.65 10.99,38.98 | U10.P$20 13.77,38.79 v12.77,37.78
  Bottom 0.406: 10.99,38.98 11.78,38.98 v11.93,38.8 | U10.P$25 11.94,36.83 v11.93,36.87
  other vias: 7.1,39.74 7.03,37.99 7.05,35.57 9.85,34.2 12.05,34.17 13.9,34.15 15.66,36.11 8.27,35.57
  pour Route15 (isolate 0.203): 6.74,42.51 6.74,32.95 17.14,33.05 17.24,42.51
  pour Route2 (isolate 0.203): 6.72,42.53 6.67,33.03 17.16,33.08 17.16,42.56
  pour Route3 (isolate 0.203): 6.72,42.53 6.67,33.03 17.16,33.08 17.16,42.56
  pour Route14 (isolate 0.203): 6.72,42.53 6.67,33.03 17.16,33.08 17.16,42.56
IN_AP2112
  Top 0.406: U3.1 10.01,7.79 9.63,8.15 9.63,9.21 10.08,9.66 U3.3
  Top 0.457: C10.1 11.75,7.94 B2.1
  Top 0.508: U3.1 11.27,7.77 C10.1
  Top 0.61: 11.59,7.94 C10.1
JTCK  (via drill 0.3)
  Top 0.203: U1.24 7.54,16.85 7.54,17.27 7.19,17.62 7.19,18.28 v7.09,18.38
  Bottom 0.203: U$5.P$2 6.27,22.25 6.27,19.2 v7.09,18.38
JTMS  (via drill 0.3)
  Top 0.203: U1.23 7.69,16.35 7.95,16.61 7.95,17.72 v7.9,17.77
  Bottom 0.203: U$5.P$4 4.22,21.71 4.88,21.15 5.23,20.87 5.23,18.77 6.25,17.75 7.87,17.75 v7.9,17.77
LED_BLUE
  Top 0.203: R8.1 4.53,11.75 U1.12
LED_GREEN
  Top 0.203: U1.11 4,12.15 3.51,11.63 R7.1
LED_RED
  Top 0.152: 3.5,12.68 3.5,12.19 3.35,12.03 2.85,12.03 2.08,11.27 1.57,11.27 1.35,11.5 1.35,11.96 R6.1
  Top 0.203: 3.5,12.68 U1.10
M1-OUT  (via drill 0.25)
  Top 0.406: M1.P$3 14.88,8 v14.9,9.1
  Bottom 0.203: 10.44,7.31 10.64,7.11 12.52,7.11 12.98,7.51
  Bottom 0.254: U2.P$16 14.17,10.41 | 12.98,7.51 14.43,8.43 14.71,8.66 v14.9,9.1
  Bottom 0.305: 14.17,10.41 14.57,10.41 R3.2
  Bottom 0.356: R5.2 8.01,7.31 10.44,7.31 | 15.09,10.43 15.16,10.31 15.19,9.72 arc-37 v14.9,9.1
  Bottom 0.406: 15.09,10.43 14.66,10.48 14.17,10.41 | 14.6,13.26 14.91,12.95 14.96,11.73 14.96,10.92
  Bottom 0.457: 14.99,10.61 15.09,10.43
  Bottom 0.61: C7.1 14.14,13.31 14.6,13.26 | 14.96,10.92 14.99,10.61
M2-OUT
  Top 0.711: U$1.P$1 26.85,19.53 C20.1
  Top 0.813: M2.P$8 29.74,13.21 29.74,13.53
  Top 1.422: 29.74,13.53 30.1,13.89 | 30.1,13.89 30.1,13.46 29.59,13.46 29.59,17.88 29.59,19.4 | 30.1,13.89 30.1,14.46 M2.P$7 M2.P$6 M2.P$5
  Top 1.93: 30.1,13.89 30.1,19.4 30.4,19.4 | U$1.P$1 26.93,18.77 28.5,18.77 arc-57 29.59,17.88
M3-OUT
  Top 0.711: C21.1 30.4,10.35 U$2.P$1
  Top 0.813: M3.P$8 27.53,16.35 arc-90 27.65,16.26 M3.P$7 | 27.56,16.25 arc-90 27.65,14.94 M3.P$6 | 27.56,12.52 arc-90 27.65,12.65 M3.P$5
  Top 1.93: 27.53,16.35 27,16.4 27,11.63 26.98,11.53 27.58,15.06 27.56,16.25 27.56,12.52 27.08,14.24 27.15,13.71 arc90 29.96,11 U$2.P$1
M4-OUTA
  Top 0.406: M4.P$7 22.36,10.03 22.71,10.13
  Top 0.457: 22.71,10.13 25.15,10.13 26.47,8.81 32.69,8.81 33.37,9.61 R13.2
M4-OUTA-IN
  Top 0.457: M2.P$2 34.58,14.52 32.66,14.52 31.77,13.71 31.77,12.35 33.11,11.07 R13.1
M4-OUTB
  Top 0.406: 21.69,8.53 21.69,8.54 M4.P$5
  Top 0.457: R14.2 34.92,9.58 34.01,8.75 32.92,7.26 22.45,7.26 21.69,8.02 21.69,8.53
M4-OUTB-IN
  Top 0.457: M2.P$4 35.49,17 36,16.5 36,12.04 R14.1
M5-OUTA
  Top 0.305: M5.P$7 20.92,21.14
  Top 0.508: 20.92,21.14 21.87,21.38 24.13,21.38 arc90 R15.2
M5-OUTA-IN
  Top 0.457: R15.1 24.08,20.23 24.08,17.9 24.46,17.52 24.46,16.55 23.64,15.73 M3.P$2
M5-OUTB  (via drill 0.4)
  Top 0.203: M5.P$5 20.22,19.79 | 24.89,19.43 R16.2
  Top 0.406: 20.22,19.79 M5.P$5 20.3,19.63
  Top 0.457: v24.89,19.86 24.89,19.43
  Top 0.61: 20.3,19.63 20.65,19.27 v20.65,19.07
  Bottom 0.508: v20.65,19.07 21.49,19.86 v24.89,19.86
M5-OUTB-IN
  Top 0.203: R16.1 24.92,18.32
  Top 0.356: 25.43,13.43 25.45,13.43 25.48,13.46
  Top 0.457: M3.P$4 23.1,13.2 23.5,12.8 24.69,12.8 25.43,13.43 | 25.48,13.46 25.48,16.71 25.27,17.98 25.02,18.21 R16.1
MPM3610_AGND
  Bottom 0.254: R1.1 11.44,8.39 11.25,8.63 U2.P$3
MPM3610_EN
  Bottom 0.254: U2.P$17 14.19,9.91
  Bottom 0.305: 14.19,9.91 14.37,9.8 R3.1
MPM3610_FB
  Bottom 0.254: U2.P$1 12.55,8.24 | R2.1 10.99,7.75 11.2,7.51 12.32,7.51 12.49,7.86 R1.2
  Bottom 0.305: 12.55,8.24 R1.2
MPM3610_SW
  Bottom 0.356: 10.54,9.09 10.57,8.99 U2.P$4
  Bottom 0.61: U2.P$5 10.11,9.35 10.11,9.09 10.54,9.09
  Bottom 1.118: U2.P$6 9.22,9.42 8.94,9.95 10.19,9.95 9.86,9.34 9.32,9.34 9.39,9.41 U2.P$5
N$1
  Top 0.203: RGB.P$4 0.76,10.6 R6.2
N$4
  Top 0.203: R7.2 3.6,9.95 RGB.P$3
N$5
  Top 0.203: R8.2 5.48,9.13 RGB.P$2
N$17
  Bottom 0.305: U10.P$21 15.6,38.14 R17.1
OUT_MPM3610  (via drill 0.4)
  Top 0.305: B2.2 12.77,7.16
  Top 0.356: 12.77,7.16 9.42,7.16 8.94,7.64 v8.94,8.22
  Bottom 0.305: v8.94,8.22 8.79,8.35 8.52,8.26
  Bottom 0.356: 10.16,12.24 10.56,12.25 U2.P$9
  Bottom 0.61: R2.2 8.79,8.12 8.52,8.26 7.8,8.88 7.8,10.73 U2.P$7
  Bottom 0.813: 8,11.93 C8.2
  Bottom 1.016: 10.31,12.34 9.42,12.36 10.16,12.24
  Bottom 1.118: 9.12,12.14 9.39,12.28 8,11.93 | 9.12,12.14 9.02,12.19 10.16,12.24 | 10.16,12.24 10.31,12.34 | 10.16,12.24 U2.P$8 | U2.P$7 9.21,12.05 9.12,12.14
PWM-1  (via drill 0.3)
  Top 0.203: M5.P$4 17.2,19.79 16.28,18.87 15.54,18.87 15.32,18.64 14.48,18.64 11.94,16.1 v11.79,16.1 | U1.18 7.22,13.81 v8.69,13.81
  Bottom 0.203: v11.79,16.1 11.61,16.1 11.07,15.57 10.59,15.57 9.37,14.34 9.07,14.34 8.69,13.96 v8.69,13.81
PWM-2  (via drill 0.3)
  Top 0.203: M5.P$2 16.34,21.09 14.76,19.5 13.44,19.5 v10.62,16.68 | U1.21 7.22,15.39 9.42,15.39 v9.53,15.29
  Bottom 0.203: v10.62,16.68 10.62,16.35 9.55,15.29 v9.53,15.29
PWM-3
  Top 0.203: U1.19 11.02,14.35 12.06,13.3 12.06,11.96 13.54,10.48 15.82,10.48 17.68,8.63 18.78,8.63 M4.P$4
PWM-4
  Top 0.203: U1.22 9.75,15.85 10.79,14.8 11.15,14.8 12.98,12.95 12.98,12.26 13.92,11.35 16.18,11.35 16.48,11.04 17.53,10.1 18.76,10.1 M4.P$2
RS485_N  (via drill 0.25)
  Top 0.178: v20.78,7.66 20.91,7.6 20.76,7.45 16.24,7.45 15.43,6.64 11.49,6.64 9.73,4.52 v9.6,4.57 | v15.22,22.12 15.33,22.12 15.33,22.01 14.93,21.64 14.38,21.64 14.24,21.74 U5.P$7
  Bottom 0.178: v20.78,7.66 20.91,7.6 21.45,8.67 arc44 21.71,9.8 arc-19 21.71,11.53 21.85,12.42 21.86,12.5 arc64 20.39,16.71 arc-43 19.09,19 arc-14 19.09,19.1 arc38 18.79,20.06 arc54 16.18,21.42 15.81,21.42 15.35,21.87 15.35,22.03 arc117 v15.22,22.12 | U$8.P$3 10.9,3.3 v9.6,4.57 | 15.35,22.14 v15.22,22.12 | U$9.P$3 13.73,26.47 13.73,26.11 arc41 14.18,24.9 arc-29 15.35,22.52 15.35,22.12 v15.22,22.12
RS485_P  (via drill 0.25)
  Top 0.178: U$8.P$4 8.9,2.96 11.65,6.31 15.56,6.31 16.38,7.12 20.91,7.12 21.22,7.43 v21.32,7.38 | v15.82,22.07 15.68,22.07 15.68,21.9 15.08,21.29 14.41,21.29 14.21,21.09 U5.P$6
  Bottom 0.178: v21.32,7.38 21.21,7.41 21.73,8.49 arc44 22.03,9.85 arc-19 22.04,11.47 22.18,12.37 22.18,12.43 arc64 20.6,16.96 arc-43 19.42,19.04 arc0 19.42,19.09 arc38 19.06,20.26 arc54 16.18,21.75 15.94,21.75 15.82,21.87 v15.82,22.07 | 15.68,22.07 v15.82,22.07 | U$9.P$4 14.06,26.46 14.06,26.11 arc41 14.43,25.12 arc-29 15.69,22.58 15.69,22.06 v15.82,22.07
SEL_SERIAL
  Top 0.203: U1.28 5.03,17.9 6.02,18.89 9.35,18.89 10.26,19.81 10.26,20.85 10.02,21.09 9.37,21.09 U5.P$3 | U5.P$3 9.4,21.09 | R20.1 8.24,20.58 8.76,21.1 8.91,21.1 | 8.91,21.1 9.32,21.1 U5.P$3 | U5.P$2 9.07,21.74 8.91,21.58 8.91,21.1
SPI_CLK  (via drill 0.3)
  Top 0.152: U1.9 2.88,12.7 1.91,11.73 v1.83,11.73
  Bottom 0.152: v1.83,11.73 1.91,11.73 3.5,13.33 3.5,13.96 3.64,14.1 U$4.P$1
SPI_CLK_2  (via drill 0.3)
  Top 0.203: U$3.P$5 8.85,36.79 v8.31,36.25
  Bottom 0.203: U10.P$10 arc55 8.75,37.83 R19.2 8.23,36.33 v8.31,36.25
SPI_IN  (via drill 0.3)
  Top 0.203: U1.7 arc-90 2.37,13.84 1.88,13.84 1.68,13.63 v1.4,13.63
  Bottom 0.127: 3.43,15.21 3.63,15.41 3.79,15.6 U$4.P$4
  Bottom 0.152: v1.4,13.63 1.55,13.63 3,15.08 3.12,15.08 3.43,15.21
SPI_IN_2  (via drill 0.3)
  Top 0.178: U$3.P$2 9.54,38.29 v8.24,39.2
  Bottom 0.178: v8.24,39.2 8.23,39.22 R18.2
  Bottom 0.203: R18.2
  Bottom 0.305: U10.P$11 8.46,38.79 R18.2
SPI_OUT  (via drill 0.3)
  Top 0.203: U1.8 1.9,13.35 v1.52,12.97
  Bottom 0.152: v1.52,12.97 1.68,12.97 3.8,15.1 U$4.P$3 4.59,15.1 4.75,15.26 4.75,15.97 4.93,16.15 6.1,16.15 6.33,15.92 U$6.P$2
SPI_OUT_2  (via drill 0.3)
  Top 0.178: v9.38,40.04 8.21,40.04 7.55,39.38 7.55,38.39 8.31,37.79 U$3.P$3
  Bottom 0.178: U10.P$12 v9.38,40.04
USART1_RX
  Top 0.203: U1.30 4.03,18.43 6.62,20.99 7.85,20.99 8.51,21.65 8.51,22.11 8.79,22.4 U5.P$1
USART1_TX
  Top 0.203: U1.29 4.53,18.16 5.74,19.38 8.46,19.38 9.34,20.25 U5.P$4
V_BAT  (via drill 0.25)
  Top 0.178: 6.03,12.27 5.89,12.11 5.89,11.5 v6.1,11.27
  Top 0.203: 6.03,11.34 v6.1,11.27 | U1.15 6.03,12.27
  Bottom 0.254: 6.06,8.24 6.35,8.53 6.35,11.02 v6.1,11.27
  Bottom 0.356: R5.1 6.06,8.24
  Bottom 0.406: R4.2 R5.1
V_CORRIENTE  (via drill 0.3)
  Top 0.203: U1.14 5.53,11.56 arc39 5.74,10.97 5.92,10.79 7.52,10.79 8.87,12.14 8.87,13 v9.09,13.23 | v11.76,15.36 12.11,15.36 C11.1 13.26,14.78 13.71,14.32 R10.1
  Bottom 0.203: v11.76,15.36 9.65,13.25 9.12,13.25 v9.09,13.23
V_TEMP  (via drill 0.3)
  Top 0.203: U1.13 5.03,11.14 5.79,10.38 8.19,10.38 9.52,11.71 R9.1 9.8,12.28 9.8,13.28 10.34,13.81 10.9,13.81 11.43,13.28 11.43,11.55 13.01,9.98 13.84,9.88 15.67,9.88 17.58,7.97 v20.14,7.97
  Bottom 0.203: NTC.2 arc-90 21.11,9.78 21.11,8.94 v20.14,7.97
VDDA-FILTRADO  (via drill 0.3)
  Top 0.254: B1.1 1.49,14.85 U1.5
  Top 0.305: B1.1 1.08,15.11 v1.52,14.98
  Bottom 0.508: C4.1 C5.1 2.14,15.34 1.78,14.98 v1.52,14.98

## Text on the board
tNames: M5 | U1 | U4 | M3 | M2 | U3 | RGB | M4
bNames: U10 | U2
tDocu: <-8.15mm-> | FFC-0.5 | 2mm-> | <-7.4mm-> | +5V | GND | B | A | JTMS | GND | JTCK | 3V3 | GND | A | B | +5V
bDocu: +5V | GND | B | A | 8MHz | FFC-0.5 | GND | 3V3 | POT | A | B | GND | +5V | JLCJLCJLCJLC